# Altium PCB PCB_V1.PcbDoc (part 3 of 3)
Units mil, origin at the board's own origin, x right, y up, seen from the top; angles counter-clockwise.
Board outline 2382 x 2362.37 mil, 4 copper layers (L1, L2, L3, L4), stack 59.054 mil thick; 159 components, 117 nets, 497 pads, 313 vias.
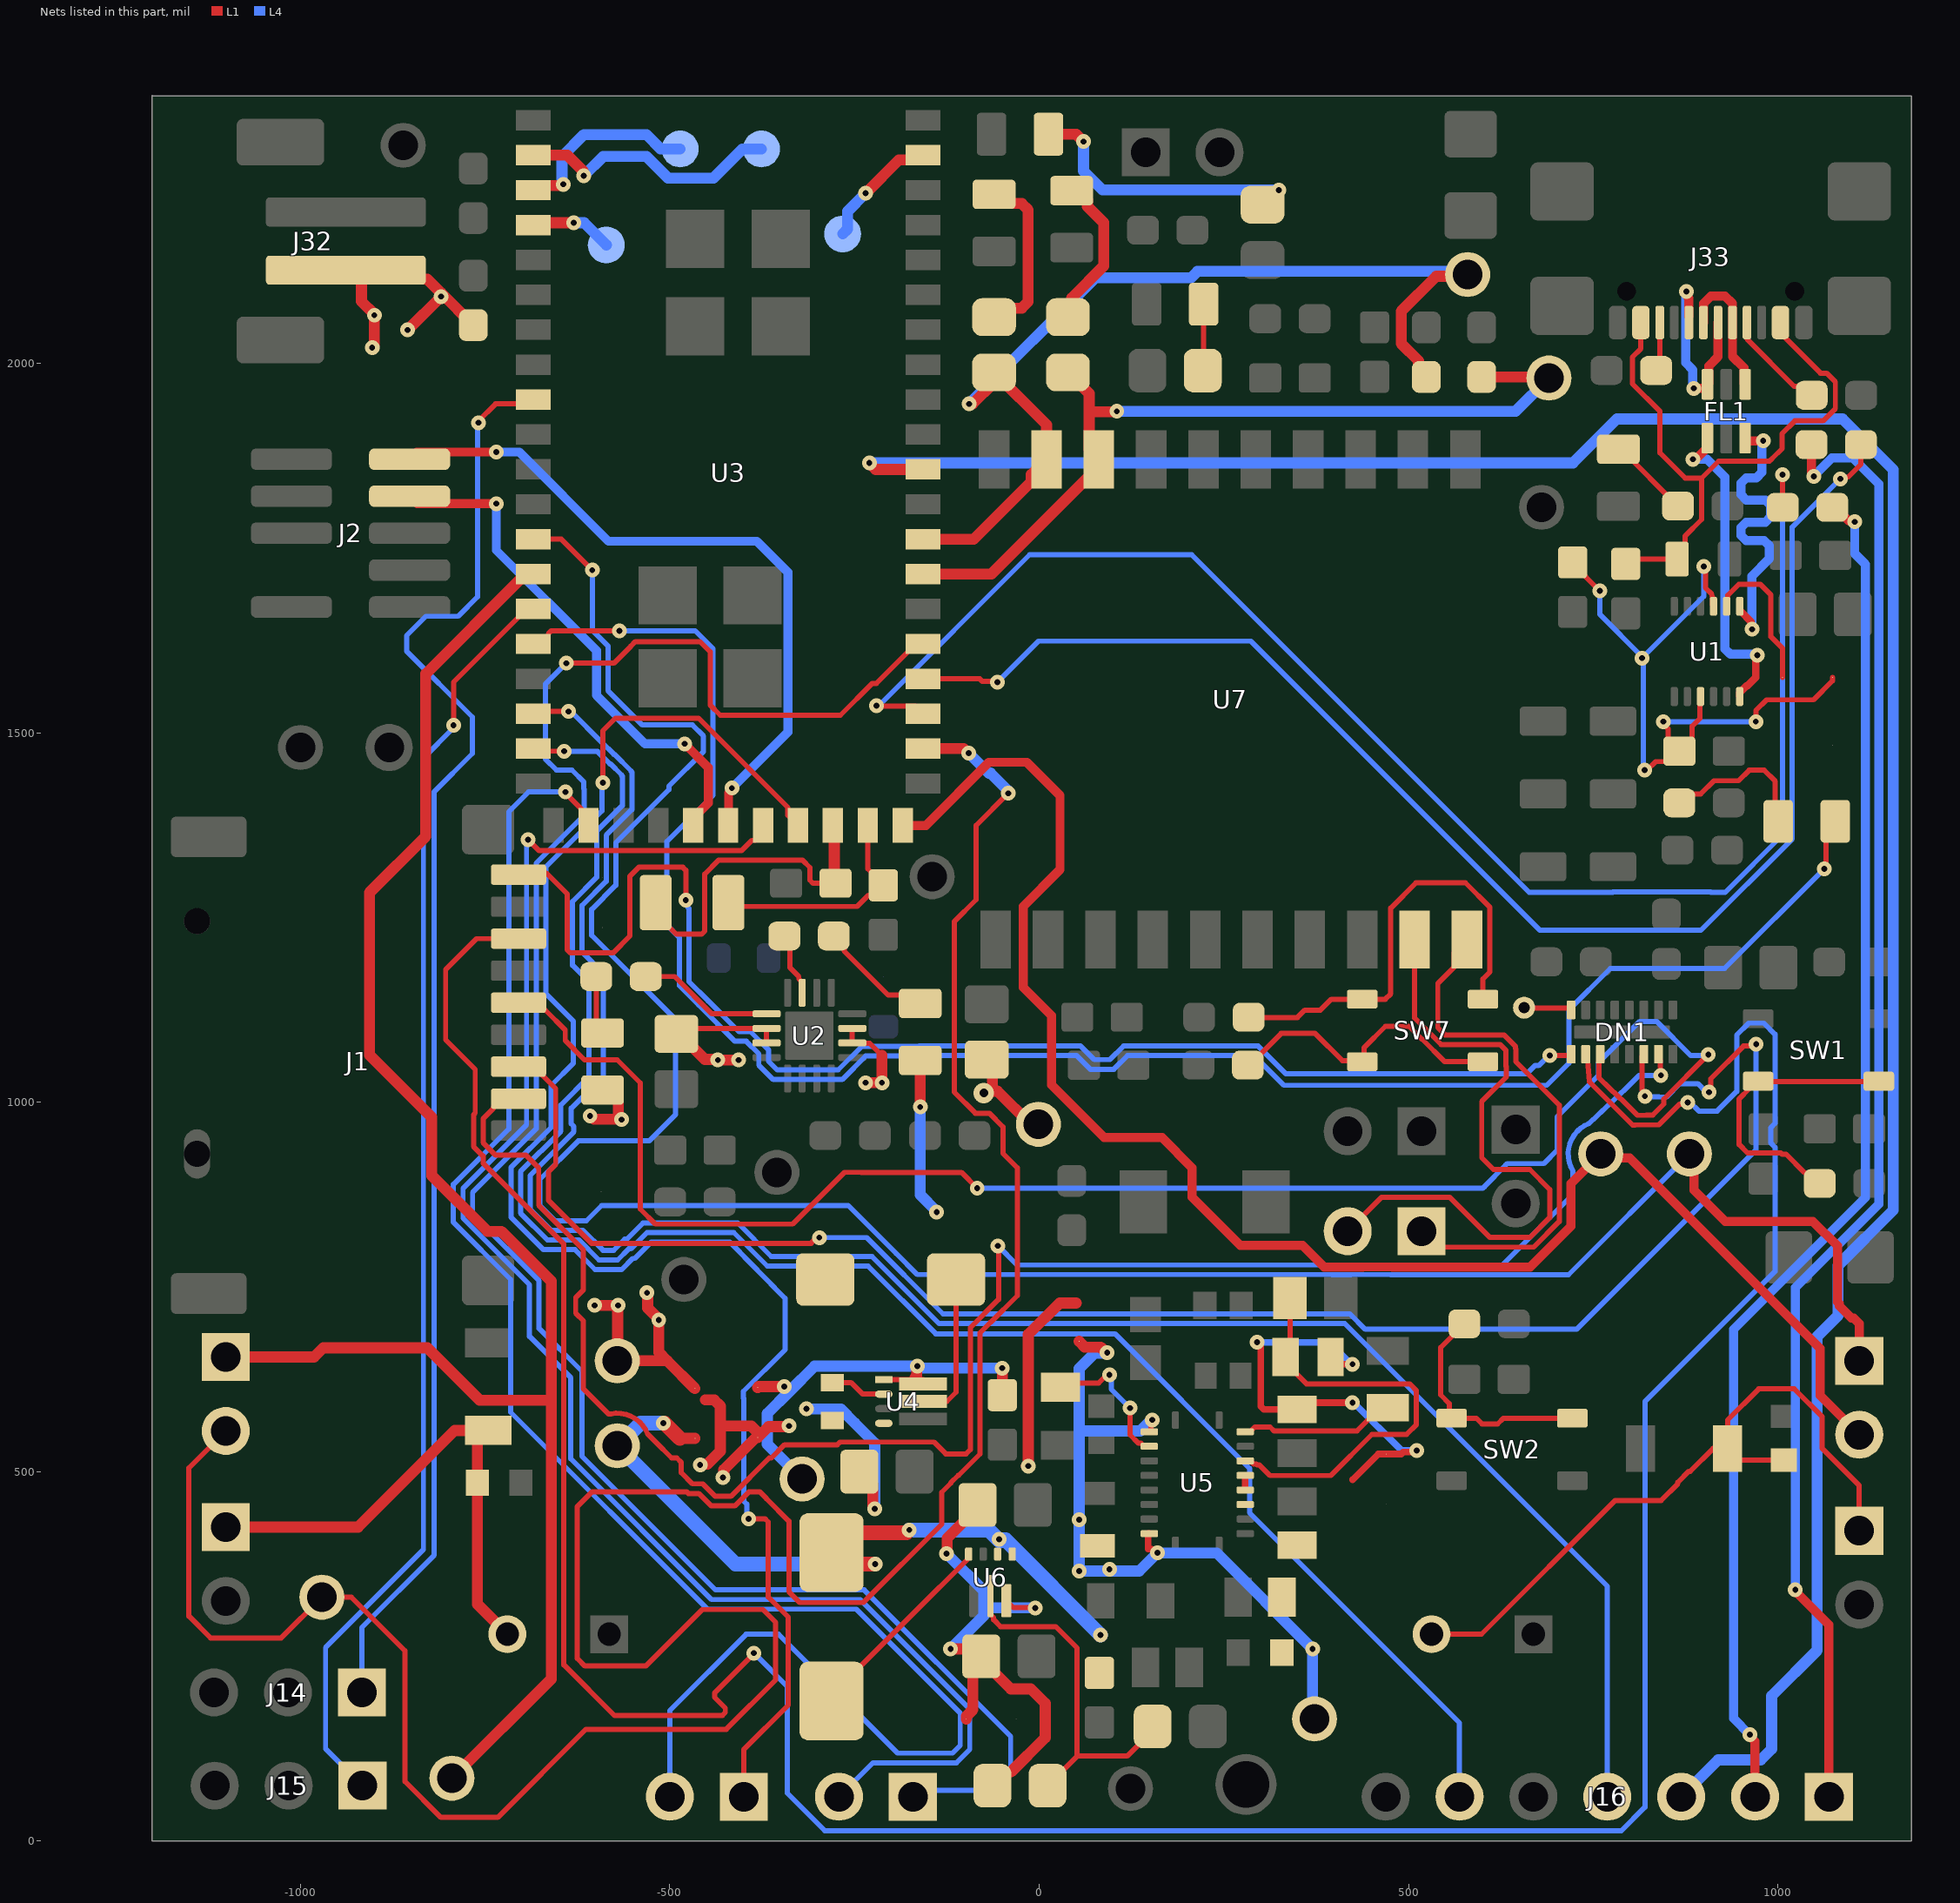
[diagram p5: the nets of this part, all layers, seen from the top]

## Via types
v1: diameter 20, hole 8, L1 to L4, tented both sides, 296 vias
v2: diameter 20, hole 8, L1 to L4, 12 vias
v3: diameter 25, hole 12.5, L1 to L4, tented both sides, 2 vias
v4: diameter 20, hole 8, L1 to L4, tented top, 2 vias
v5: diameter 27.56, hole 11.81, L1 to L4, tented both sides, 1 vias

## Nets (pads, with @x,y where several pads share a name; then routed paths per layer and width w, separated by ;. In a path a pad name is that pad's centre, name@x,y a point inside that pad or via, vN(x,y) a via of type N, cw(c..) or ccw(c..) an arc to the next point about the centre after c; other vN are vias at no path point) (continued)
NetC35_1: C35.1 C36.2 F1.2 J5.1 | length 717.6
  L1 w15: J5.1@-1101.07,425 -922,425 -791.28,555.72 -766.01,555.72 -755.93,565.81 F1.2@-746.07,555.95 -748.41,555.95 -760.6,543.76 -760.6,320.63 C36.2@-719.97,280
NetC37_1: C37.1 C38.2 F2.1 J7.1 | length 965
  L1 w7: C38.2@531.1,280 598.62,280 779.64,461.01 841.85,461.01 864.5,483.66 864.5,485.56 879.44,500.5 881.34,500.5 912.15,531.31 F2.1@931.84,531.31 947.58,515.56 993.76,515.56 C37.1@1007.98,515.56 ; F2.1@931.84,529.5 931.84,569.84 974,612 1022,612 1059.85,574.15 1059.85,531.33 1110,481.18 J7.1@1110,420
NetD1_A: D1.A R1.1 | length 112.6
  L1 w7: D1.A@783.93,1883.58 787.73,1883.58 R1.1@864.69,1806.63
NetD2_K: D2.K R4.2 | length 79.9
  L1 w7: R4.2@-599.53,1170 -599.53,1102.05 D2.K@-591.07,1093.59
NetD3_K: D3.K R3.2 | length 158.5
  L1 w7: R3.2@-278.05,1224.8 -263.91,1210.66 -263.91,1204.28 -204.63,1145 -172.48,1145 D3.K@-161.07,1133.59
NetD6_A: D6.A R7.2 | length 210.2
  L1 w7: R7.2@866.54,1405 878.68,1417.14 895.47,1417.14 913.33,1435 946.77,1435 960.93,1449.16 981.39,1449.16 996.33,1434.23 996.33,1384.03 D6.A@1000.35,1380
NetD12_A: D12.A R22.2 | length 366.6
  L1 w15: D12.A@12.51,2310 50,2310 v1(60,2300)
  L4 w15: v1(60,2300) 60,2260.19 85.75,2234.44 v1(324.44,2234.44)
NetD14_A: D14.A R36.2 | length 90.5
  L1 w7: R36.2@221.33,1990 222.51,1991.18 D14.A@222.51,2080
NetD15_A: D15.A R37.2 | length 214.5
  L1 w15: R37.2@38.93,2062.41 43.93,2067.41 43.93,2088.25 87.37,2131.68 87.37,2190.15 65.37,2212.15 65.37,2221.2 52.99,2233.58 D15.A@43.93,2233.58
NetD16_A: D16.A R38.2 | length 233.6
  L1 w15: R38.2@-61.07,2062.41 -48.91,2074.57 -23.79,2074.57 -15,2083.35 -15,2207.42 -23.79,2216.2 -48.69,2216.2 D16.A@-61.07,2228.58
NetDN1_1: DN1.1 J1.9 | length 1873.7
  L1 w7: J1.9@-704.88,1307.87 -702.13,1307.87 -700,1310 -667.2,1310 -638.96,1281.77 -638.96,1206.1 -634.86,1202 -577,1202 -554,1225 -554,1305.95 -542.04,1317.9 -482.54,1317.9 -478.44,1313.8 v1(-478.44,1273.32) ; v1(691.32,1063.13) 718.31,1063.13 DN1.1@720.04,1064.86
  L4 w7: v1(-478.44,1273.32) -475.95,1270.83 -475.95,1263.99 -474,1262.04 -474,1226.99 -474,1163.02 -448,1137.02 -448,1136.94 -406.56,1095.5 -391.1,1095.5 -366.56,1070.96 -366.56,1055.5 -354.73,1043.67 -272.11,1043.67 -240.18,1075.6 -163.12,1075.6 -162.72,1076 56.08,1076 74.51,1057.57 95.63,1057.57 114.06,1076 296.34,1076 333.66,1038.69 660.24,1038.69 671.03,1049.48 675.98,1049.48 689.63,1063.13 v1(691.32,1063.13)
NetDN1_2: DN1.2 J1.7 | length 4440.1
  L1 w7: J1.7@-704.88,1221.26 -761.8,1221.26 -803.5,1179.56 -803.5,1084.27 -763.5,1044.27 -763.5,985.2 -765.78,982.91 -765.78,939.92 -752.78,926.92 -752.78,917.35 -643.5,808.06 -643.5,238.5 -575,170 -429,170 -424.9,174.1 -424.9,179.9 -439.6,194.6 -439.6,200.4 -386.2,253.8 v1(-386.2,254.4) ; DN1.2@739.72,1064.86 742.13,1055.96 744.73,1027.56 801.26,971.03 803.31,968.98 806.24,968.98 838.67,969.29 866.4,997.02 875.34,997.02 v1(877.83,999.51)
  L4 w7: v1(-386.2,254.4) -341,209.19 -341,64.88 -290.12,14 787.99,14 819.93,45.95 819.93,594.76 996,770.83 996,938.94 990.38,944.56 990.38,965.68 996,971.3 996,1091.87 980.87,1107 960.38,1107 944.24,1090.85 944.24,1014.54 917.69,988 892.86,988 881.35,999.51 v1(877.83,999.51)
NetDN1_3: DN1.3 J1.5 | length 2269.8
  L1 w7: J1.5@-704.88,1134.64 -694.6,1124.37 -668.37,1124.37 -641.6,1097.6 -641.6,1083.37 -615.54,1057.3 -571.19,1057.3 -540,1026.11 -540,855.33 -519.67,835 -333.81,835 -263.72,905.1 -241.22,905.1 -240.99,904.87 -105.37,904.87 v1(-84,883.5) ; DN1.3@759.41,1064.86 757.73,1055.96 757.73,1032.94 772.67,1018.01 792.13,999.81 807.84,984.1 809.7,982.23 815.5,982.23 821.96,982.31 823.8,982.57 ; 823.81,982.58 830.49,982.58 845.42,997.51 845.42,1001.29 845.42,1004.19 v1(905.74,1064.5)
  L4 w7: v1(-84,883.5) -63.5,883.5 597.62,883.5 600.52,883.5 602.62,885.6 631.23,914.74 633.31,916.82 683.09,916.82 701,934.73 701,980.19 756.93,1036.11 756.93,1053.27 812.86,1109.19 835.81,1109.19 882,1063 904.24,1063 v1(905.74,1064.5)
NetDN1_6: DN1.6 J1.3 | length 2434.3
  L1 w7: J1.3@-704.88,1048.03 -683.33,1048.03 -673.05,1037.75 -673.05,1036.89 -665.16,1029 -654.54,1018.4 -654.54,915.54 -664.5,905.58 -664.5,867.4 -606.11,809 -308.88,809 -301.17,816.72 v1(-297.65,816.72) ; DN1.6@818.46,1064.86 816.06,1062.45 816.06,1046.95 816,1046.89 816,1015.52 819.92,1011.59 v1(819.92,1008.08) ; v1(906.49,1013.5) 908.97,1015.99 908.97,1031.68 953.3,1076.01 968.01,1076.01 v1(970.5,1078.49)
  L4 w7: v1(-297.65,816.72) -233.49,816.72 -130.27,713.5 420.5,713.5 441.41,692.59 727.53,692.59 970.5,935.56 v1(970.5,1078.49) ; v1@820.08,1007.92 820.93,1007.07 839.11,1007.07 839.26,1006.92 849.18,1006.92 867.29,1025.03 891.44,1025.03 902.97,1013.5 v1(906.49,1013.5)
NetDN1_7: DN1.7 J1.2 | length 2529.9
  L1 w7: J1.2@-704.88,1004.72 -728.5,1004.72 -738.78,994.45 -738.78,991.53 -752.78,977.53 -752.78,945.31 -735.62,928.14 -694.67,928.14 -677.5,910.97 -677.5,860.45 -617,799.95 -617,746.06 -627.5,735.56 -627.5,714.44 -617,703.94 -617,612 -583.18,578.18 -580.28,578.18 -579.62,578.18 cw(c-571.07,535) -530.05,550.96 -529.05,549.96 -519.24,540.15 -497.59,518.5 -490.57,518.5 -484.5,512.44 -484.5,498.44 -469.56,483.5 -455.56,483.5 -438.56,466.5 -417.44,466.5 -365.43,518.5 -362.66,518.5 -344.77,536.39 -273.31,536.39 -269.66,540.03 -142.47,540.03 -126.44,524 -99.08,524 -93.19,529.9 -93.19,694.84 -55,733.03 -55,804.63 v1(-55.87,805.5) ; DN1.7@838.15,1064.86 840.56,1055.96 v1(841.5,1036.33)
  L4 w7: v1(-55.87,805.5) -30.05,779.67 412.24,779.67 412.45,779.67 ccw(c417.5,825.39) 422.54,779.67 479.13,779.67 479.4,779.39 626.62,779.39 722.6,875.37 722.6,906.8 cw(c760,930) 724.42,955.91 cw(c760,930) 744.15,971.06 795.6,1019.82 811.7,1035.91 841.08,1035.91 v1(841.5,1036.33)
NetJ33_A5: J33.A5 R15.2 | length 141.6
  L1 w7: J33.A5@958.14,2055.12 958.14,2032.49 1021.84,1968.79 1033.54,1968.79 R15.2@1045.68,1956.65
NetJ33_B5: J33.B5 R13.2 | length 66.9
  L1 w7: R13.2@835.08,1990.27 840.03,1995.22 J33.B5@840.03,2055.12
NetL1_1: L1.1 U4.6 | length 202.5
  L1 w7: U4.6@-157.28,595 -125,595 -112.49,607.51 L1.1@-112.49,760
NetL3_1: L3.1 U6.7 | length 275.6
  L1 w7: L3.1@-281.07,189.61 -281.07,197.32 -170.95,307.44 -97.02,381.37 -97.02,383.03 -95.6,384.45 U6.7@-95.6,388.39
NetR3_1: R3.1 U2.7 | length 86.8
  L1 w7: R3.1@-344.98,1224.8 -337.38,1217.2 -337.38,1181.98 -325.39,1169.98 -325.39,1166.78 -320.91,1162.3 U2.7@-320.91,1148
NetR4_1: R4.1 U2.9 | length 184.5
  L1 w7: R4.1@-532.6,1170 -493.58,1170 -443.08,1119.5 -409.44,1119.5 ; -409.4,1119.53 U2.9@-369.06,1119.53
NetR8_1: R8.1 SW1.3 SW1.4 | length 394.6
  L1 w7: R8.1@1056.54,890 1051.15,890 1036.08,905.07 1035.47,905.07 1010.92,929.62 1005.32,929.62 1003.63,931.31 958.85,931.31 947.54,942.62 947.54,1004.43 961.49,1018.38 974.64,1025.65 973.15,1027.14 SW1.3@973.15,1028.34 973.81,1027.68 1135.87,1027.68 SW1.4@1136.54,1028.34
NetR9_1: R9.1 SW2.3 SW2.4 | length 322.3
  L1 w7: R9.1@575.47,700 543.31,667.85 543.31,603.85 555,592.17 555,572.32 555,570 555.98,570 SW2.4@558.31,572.32 591.61,572.32 599.44,564.5 620.56,564.5 628.39,572.32 SW2.3@721.69,572.32
NetR25_2: R25.2 U5.3 | length 198.3
  L1 w7: R25.2@28.93,614.37 34.56,620 80.48,620 91.48,631 v1(95,631) ; v1(123,586) 123,549.65 133.97,538.68 137.42,538.68 140.66,535.44 147.75,535.44 U5.3@148.97,534.22
  L4 w7: v1(95,631) 97.49,628.51 97.49,611.51 v1(123,586)
NetR26_1: R26.1 U5.19 | length 210.7
  L1 w7: U5.19@278.89,553.9 285.36,553.9 291.74,560.27 312.59,560.27 318.01,554.86 379.86,554.86 379.99,554.99 430.12,554.99 461.75,586.62 R26.1@471.59,586.62
NetR27_2: R27.2 R29.1 U5.17 | length 597.9
  L1 w7: U5.17@278.89,514.53 285.98,514.53 290.44,510.07 293.89,510.07 294.69,509.27 297.73,509.27 312.35,494.65 394.73,494.65 450.34,550.25 497.32,550.25 510.64,563.57 510.64,609.67 501.58,618.72 361.71,618.72 333.38,647.06 R27.2@333.38,655 339.48,661.11 R29.1@339.48,735
NetR30_2: R30.2 R31.1 U6.2 | length 487.4
  L1 w7: U6.2@-66.07,331.3 -66.07,306.7 -61.8,302.43 -61.8,299.58 -52.25,290.03 22.53,290.03 51.33,261.23 51.33,115 ; R31.1@11.33,75 51.4,115.07 118.99,115.07 153.51,149.58 R30.2@153.51,155.14
NetR35_2: R35.2 SW7.1 SW7.2 | length 612.2
  L1 w7: R35.2@283.46,1115 283.96,1114.5 349.44,1114.5 359.44,1124.5 380.56,1124.5 395.44,1139.37 SW7.1@437.3,1139.37 468.47,1139.37 475.76,1146.66 475.76,1262.59 510.01,1296.83 576.99,1296.83 610.1,1263.72 610.1,1176.29 600.69,1166.87 SW7.2@600.69,1139.37
NetR39_1: R39.1 SW7.3 SW7.4 | length 401.4
  L1 w7: R39.1@282.4,1050 284.4,1050 327.39,1093 373.45,1093 410.23,1056.22 435.81,1056.22 SW7.3@437.3,1054.73 439.83,1057.26 439.83,1073.92 468.6,1102.69 500.56,1102.69 517.65,1085.6 518,1085.6 548.87,1054.73 SW7.4@600.69,1054.73
NetR40_1: R40.1 U4.2 | length 76.1
  L1 w7: R40.1@-280,620.59 -254.8,620.59 -239.06,604.85 U4.2@-210.43,604.84
OUT_3V3: C33.2 JP11.1 L1.2 R40.2 U4.4 | length 259.9
  L1 w15: C33.2@-243.47,500 -225.38,481.91 -225.38,453.65 -222.59,450.85 v1(-222.59,449.5)
  L4 w15: v1(-315,585) -314.72,584.72 -268.72,584.72 -249.79,565.79 -222.59,538.59 v1(-222.59,449.5)
OUT_5V: C27.2 C31.2 JP12.1 R31.2 U6.3 | length 764.4
  L1 w7: U6.3@-44.41,325.4 -34.97,315.96 v1@-5.96,315.96
  L1 w15: v1(-125.49,388.95) -124.54,389.91 -124.54,410 -83.47,451.07 C27.2@-83.47,455 ; v1(-120,260) -88.47,260 C31.2@-78.47,250 ; JP12.1@-98.75,165 -98.75,168.94 -89.82,177.87 -89.82,238.66 C31.2@-78.47,250 ; R31.2@-63.47,75 -63.47,76.08 -45.78,93.76 -38.04,93.76 8.18,139.98 8.18,186.32 -11.47,205.98 -38.38,205.98 -78.47,246.07 C31.2@-78.47,250 ; v1@-5.96,315.96 v1(-5.53,315.53)
  L4 w15: v1(-125.49,388.95) -123.92,387.38 -123.8,387.38 -75,338.57 -75,315.53 ; v1(-120,260) -75,305 -75,315.53 ; v1(-5.53,315.53) -75,315.53
OUT_6V: C24.1 C25.1 JP10.1 R27.1 U5.14 U5.15 U5.16 | length 616.8
  L1 w9: U5.15@278.89,475.16 U5.16@278.89,494.85 ; v1(295,675) 295.9,675 300,670.9 300,621 300,588.16 304.1,584.06 336.94,584.06 C25.1@348.93,584.06 ; C25.1@359.18,594.31 360.27,593.22 v1(424.05,593.22) ; R27.1@394.49,655 404.18,645.31 v1(424.05,645.31) ; 424,489 458.75,523.75 JP10.1@470,523.75 490,523.75 492.53,526.28 508.49,526.28 v1(510.85,528.64)
  L4 w9: v1(295,675) 392.68,675 422.37,645.31 v1(424.05,645.31) ; v1(424.05,593.22) 426.01,593.22 490.35,528.88 510.61,528.88 v1(510.85,528.64)
PA02_PWM_1: J8.2 TP21.1 U3.31 | length 2206.3
  L1 w12.33: U3.31@-184.85,1374.45 -153.56,1374.45 -68.01,1460 -17,1460 28.16,1414.84 28.16,1314.82 -21.83,1264.83 -21.83,1155.54 16.72,1116.99 16.72,1023.28 88.02,951.98 166.02,951.98 207,911 207,871.59 272.43,806.15 356.52,806.15 385.94,776.73 437.65,776.73 437.92,776.99 478.04,776.99 478.3,776.73 664.5,776.73 719.66,831.89 719.66,889.66 TP21.1@760,930 765.35,924.65 799.3,924.65 1057.18,666.77 1057.18,602.82 J8.2@1110,550
PA03_PWM_1: J6.2 TP20.1 U3.33 | length 3930.3
  L1 w7: J6.2@-1101.07,555 -1151.07,505 -1151.07,304.29 -1121.78,275 -1026.07,275 TP20.1@-971.07,330 -931,330 -858.55,257.55 -858.55,80.65 -809.89,31.99 -733.01,31.99 -613.65,151.35 -423.61,151.35 -356.7,218.26 -356.7,296.02 -373.98,313.3 -456.31,313.3 -532.69,236.91 -615.01,236.91 -625.26,247.17 -625.26,452.69 -605.52,472.43 -476.87,472.43 -474.95,470.5 -460.95,470.5 -443.95,453.5 -412.05,453.5 -393.13,472.43 -377.87,472.43 -369.08,463.64 -369.08,463.21 -338.88,433.01 -338.88,367.28 -338.88,337.59 -324.04,322.75 -238.1,322.75 -132,428.85 -132,472 -119.56,484.44 -119.56,485.13 -109.66,495.03 -108.97,495.03 -80.19,523.81 -80.19,687.81 -66,702 -65.62,702 -29.5,738.12 -29.5,911.05 -49.08,930.63 -49.08,966.62 -67.47,985 -86.47,985 -115.1,1013.63 -115.1,1244.32 -85.54,1273.87 -85.54,1374.46 v1(-42,1418)
  L1 w15: U3.33@-157.14,1478.44 -102.63,1478.44 -96.69,1472.5 v1(-95.34,1472.5)
  L4 w15: v1(-95.34,1472.5) -68.23,1445.39 -65.89,1445.39 -42.96,1422.46 -42.96,1418.96 v1(-42,1418)
"PA04 OLED SPI_MOSI": R16.2 U3.34 | length 2132.3
  L1 w7: v1(-220.28,1536.5) -219.74,1535.96 -167.42,1535.96 U3.34@-157.14,1525.68 ; v1(1006.21,1849.17) 1006.21,1805.32 R16.2@1006.53,1805
  L4 w7: v1(-220.28,1536.5) -217.28,1536.5 -13,1740.79 206.39,1740.79 663.18,1284 776.32,1284 776.82,1284.5 908.8,1284.5 909.3,1284 928.53,1284 1006.21,1361.68 v1(1006.21,1849.17)
"PA04 OLED SPI_MOSI_1": J16.1 R17.1 | length 1999.8
  L1 w12.33: v1(1023.5,340) 1023.5,337.92 1068.93,292.49 J16.1@1068.93,60 ; R17.1@1045.47,1890 1045.47,1852.11 1048.71,1848.87 v1(1048.71,1846.79)
  L4 w12.33: v1(1023.5,340) 1023.5,749.21 1136.49,862.2 1136.49,1836.51 1101.34,1871.66 1072.8,1871.66 1048.71,1847.57 v1(1048.71,1846.79)
"PA05 OLED SPI_SCK": R17.2 U3.35 | length 1991.7
  L1 w7: U3.35@-157.14,1572.92 -80.5,1572.92 -77,1569.42 -57.42,1569.42 v1(-56.5,1568.5) ; v1(1084.47,1843.5) 1086.95,1845.99 1095.07,1845.99 1112.4,1863.32 R17.2@1112.4,1890
  L4 w7: v1(-56.5,1568.5) -1,1624 286.41,1624 677.91,1232.5 895.42,1232.5 1019.21,1356.3 1019.21,1778.25 v1(1084.47,1843.5)
"PA05 OLED SPI_SCK_1": J16.2 R16.1 | length 1855.7
  L1 w12.33: v1(961.86,144) 961.86,141.92 968.97,134.82 J16.2@968.93,60 ; R16.1@1073.46,1805 1077.41,1805 1095.5,1786.9 1102.43,1786.9 v1(1103.89,1785.43)
  L4 w12.33: v1(961.86,144) 940,165.86 940,692.68 1118.16,870.84 1118.16,1727.91 1103.89,1742.17 v1(1103.89,1785.43)
PA06_5: J9.1 U3.36 | length 2790.6
  L1 w7: v1(-640.28,1594.03) -575.69,1594.03 -552.89,1616.83 -552.89,1617.2 -546.74,1623.35 -459.3,1623.35 -445.47,1609.52 -445.47,1537.44 -431.64,1523.61 -269.23,1523.61 -226.09,1566.75 -220.4,1566.75 -166.98,1620.17 U3.36@-157.14,1620.17
  L4 w7: v1(-640.28,1594.03) -668.5,1565.81 -668.5,1464.44 -653.56,1449.5 -632.44,1449.5 -616.33,1433.39 -616.33,1424.15 -615.94,1423.77 -615.94,1388.5 -681.01,1323.43 -681.01,963.93 -767,877.94 -767,848.27 -677,758.27 -677,693.69 -619,635.69 -619,520.69 -438.2,339.9 -236.89,339.9 -38.66,141.67 -38.66,99 -68.83,68.83 -162.24,68.83 J9.1@-171.07,60
"PA11 OLED SS_1": J16.3 U3.41 | length 3464.3
  L1 w15: v1(-230,1865) -221.39,1856.39 U3.41@-157.14,1856.39
  L4 w15: v1(-230,1865) 722.5,1865 782,1924.5 1087.5,1924.5 1156.15,1855.85 1156.15,854.06 1081.16,779.07 1081.16,710.91 1053,682.75 1053,258 991.36,196.36 991.36,124.64 976.72,110 918.93,110 J16.3@868.93,60
PA17_1: J14.1 U3.9 | length 1972.2
  L1 w7: v1(-759.07,1919.5) -759.07,1921.83 -735.9,1945 -690.58,1945 U3.9@-684.7,1950.88
  L4 w7: J14.1@-917.03,201.11 -917.03,288.97 -819,387 -819,791.38 -819.38,791.76 -819.38,1419.68 -767.31,1471.75 -767.31,1521.25 -856.37,1610.31 -856.37,1631.43 -830.24,1657.57 -786.63,1657.57 -760.5,1683.7 -760.5,1918.07 v1(-759.07,1919.5)
PA20_FB_M2_1: J8.1 TP22.1 U3.13 | length 3426.6
  L1 w7: U3.13@-684.7,1761.9 -646.9,1761.9 v1(-605,1720)
  L1 w12.33: TP22.1@880,930 886.17,923.83 886.17,881 928.57,838.6 1047.22,838.6 1080.46,805.35 1080.46,729.71 1082.84,727.33 1082.84,724.33 1099.33,707.84 1102.33,707.84 1110,700.17 J8.1@1110,650
  L4 w7: v1(-605,1720) -605,1638.65 -583.78,1617.43 -583.78,1556.98 -537.3,1510.5 -469.44,1510.5 -454.5,1495.56 -454.5,1474.44 -501.3,1427.64 -501.3,1422.94 -573.1,1351.15 -573.1,1293.5 -605.72,1260.88 -605.72,1225.72 -492.5,1112.5 -492.5,982.9 -520.9,954.5 -527.9,947.5 -623.91,947.5 -676.04,895.36 -676.04,860.55 -654.95,839.46 -613.02,839.46 -592.48,860 -258.39,860 -193.88,795.5 -165.06,766.67 383.83,766.67 383.92,766.67 384.04,766.67 395.96,766.39 422.24,766.39 444.96,766.67 466.08,766.67 475.69,766.39 716.39,766.39 TP22.1@880,930
PA21_FB_M1_1: J6.1 TP23.1 U3.14 | length 2371.4
  L1 w15: J6.1@-1101.07,655 -981.58,655 -969.12,667.46 -828.18,667.46 -757.22,596.5 -660.5,596.5 ; TP23.1@-795,85 -660.5,219.5 -660.5,596.5 ; U3.14@-684.7,1714.66 -690.98,1708.38 -701.64,1708.38 -830.5,1579.52 -830.5,1359.65 -906.5,1283.65 -906.5,1063.78 -822.31,979.59 -822.31,900.59 -746.83,825.11 -728.17,825.11 -660.5,757.44 -660.5,596.5
PA22_1: J15.1 U3.15 | length 1739.1
  L1 w7: v1(-792.81,1510) -792.81,1568.41 -704.82,1656.4 -704.82,1657.14 -694.54,1667.41 U3.15@-684.7,1667.41
  L4 w7: J15.1@-913.46,72.4 -966,124.94 -966,262 -833.53,394.47 -833.53,1465.76 -792.81,1506.48 v1(-792.81,1510)
"PA24 OLED RST_1": J16.4 U3.18 | length 2829.2
  L1 w7: U3.18@-684.7,1525.68 -681.67,1528.71 v1(-637.16,1528.71)
  L4 w7: v1(-637.16,1528.71) -633.71,1528.71 -592.59,1487.59 -575.84,1470.84 -574.88,1470.84 -552.33,1448.28 -552.33,1447.33 -551.38,1446.38 -551.38,1395.94 -586.1,1361.23 -586.1,1298.88 -618.72,1266.26 -618.72,1202.89 -590.08,1174.25 -590.08,1035.23 -633.54,991.76 -633.54,970.64 -629.88,966.97 -629.88,959.91 -689.04,900.75 -689.04,855.17 -660.33,826.46 -617.52,826.46 -590.56,799.5 -576.03,799.5 -561.03,814.5 -558.27,814.5 -536.29,836.48 -408.05,836.48 -362.79,791.22 -226.37,791.22 -135.65,700.5 413.5,700.5 768.93,345.07 J16.4@768.93,60
"PA25 OLED A0_1": J16.6 U3.19 | length 2525.8
  L1 w7: U3.19@-684.7,1478.44 -681.26,1475 v1(-643,1475)
  L4 w7: v1(-643,1475) -642.59,1474.59 -597.97,1474.59 -581.22,1457.84 -580.26,1457.84 -565.33,1442.9 -565.33,1441.94 -564.38,1441 -564.38,1401.33 -599.1,1366.61 -599.1,1304.27 -631.72,1271.65 -631.72,1185.27 -609.27,1162.82 -609.27,1034.42 -647.66,996.03 -647.66,960.51 -702.04,906.13 -702.04,849.79 -665.72,813.46 -622.91,813.46 -595.95,786.5 -570.65,786.5 -555.65,801.5 -552.88,801.5 -530.91,823.48 -413.43,823.48 -368.17,778.22 -231.76,778.22 -140.04,686.5 102.56,686.5 284.63,504.44 284.63,444.3 568.93,159.99 J16.6@568.93,60
PB02_5: J9.2 U3.27 | length 2217.4
  L1 w7: v1(-691.79,1355.05) -677.07,1340.33 -639.16,1340.33 -638.99,1340.5 -628.34,1340.5 -628.17,1340.33 -402.94,1340.33 -388.94,1354.33 -384.1,1354.33 -373.82,1364.61 U3.27@-373.82,1374.45
  L4 w7: v1(-691.79,1355.05) -694.01,1352.83 -694.01,969.32 -780,883.33 -780,842.89 -690,752.89 -690,683 -634,627 -634,517.31 -443.59,326.9 -242.28,326.9 -94,178.62 -94,123.96 -111.96,106 -225.07,106 J9.2@-271.07,60
PB03_5: J4.1 U3.28 | length 2286.7
  L1 w7: v1(-590.83,1432.34) -590.83,1502.34 -573.55,1519.61 -461.08,1519.61 -340.36,1398.9 -340.36,1388.23 U3.28@-326.58,1374.45 ; J4.1@-400,60 -400,123.87 -339.7,184.17 -339.7,303.06 -366.94,330.3 -366.94,431.94 -371.21,436.21 v1(-393.28,436.21)
  L4 w7: v1(-590.83,1432.34) -591.78,1431.38 -591.78,1394.28 -668.01,1318.05 -668.01,1146.95 -630.49,1109.43 -630.49,1052.75 -660.66,1022.58 -660.66,965.9 -715.04,911.52 -715.04,844.4 -671.1,800.46 -628.29,800.46 -601.33,773.5 -565.26,773.5 -550.26,788.5 -547.5,788.5 -525.53,810.47 -418.81,810.47 -416.75,808.41 -346.01,736.41 -344,734.37 -344,665.04 -400.5,608.54 -400.5,599.44 -400,598.94 -400,460.21 -395.77,455.98 -395.77,438.7 v1(-393.28,436.21)
PB22_5: J4.2 U3.22 | length 2466.1
  L1 w7: v1(-641.44,1419.75) -641.44,1418.39 -619.27,1396.22 -619.27,1393.52 -610.04,1384.3 U3.22@-610.04,1374.45
  L4 w7: v1(-641.44,1419.75) -691.32,1419.75 -718.1,1392.97 -718.1,963.62 -793,888.71 -793,837.5 -715.5,760 -715.5,580.42 -448.97,313.9 -247.66,313.9 -107,173.23 -107,129.35 -117.34,119 -191.91,119 -352.8,279.9 -396.77,279.9 -500,176.66 J4.2@-500,60
RS_3: JP1.2 U1.2 | length 204.2
  L1 w7: U1.2@930.51,1671.03 931.93,1672.45 931.93,1685.86 946.95,1700.88 952.16,1700.88 952.25,1700.98 975.84,1700.98 990.44,1686.38 990.44,1629.88 1006.25,1614.06 JP1.2@1006.25,1575
SCL_AI_1: R23.1 R38.1 TP24.1 U3.39 U7.9 | length 1388.5
  L1 w15: U3.39@-157.14,1761.9 -88.63,1761.9 -10.87,1839.66 -10.87,1849.34 U7.9@9.8,1870 9.8,1916.74 R38.1@-61.07,1987.6 -61.07,1973.93 -90,1945 v1(-95,1945) ; R23.1@523.93,1981.54 513.32,1992.15 513.32,2003.29 489.93,2026.67 489.93,2070.26 537.35,2117.68 577.68,2117.68 TP24.1@580,2120
  L4 w15: v1(-95,1945) 75.5,2115.5 205.51,2115.5 214.35,2124.35 575.65,2124.35 TP24.1@580,2120
SD_CARD_DETECT_2: DN1.16 TP1.1 | length 65.1
  L1 w7: TP1.1@656.32,1127.83 656.88,1127.3 717.63,1127.3 720.04,1124.89 DN1.16@720.04,1124.7
SDA_AI_1: R21.1 R37.1 TP25.1 U3.38 U7.8 | length 1172.3
  L1 w15: U3.38@-157.14,1714.66 -65,1714.66 U7.8@85.5,1865.17 ; R37.1@38.93,1987.6 67.49,1959.04 67.49,1933.89 ; U7.8@80.66,1870 67.49,1883.17 67.49,1933.89 ; v1@104.4,1934.4 68,1934.4 67.49,1933.89 ; R21.1@598.93,1981.54 688.46,1981.54 TP25.1@690,1980
  L4 w15: v1(105,1935) 645,1935 TP25.1@690,1980
SPK+_9: J10.1 U7.20 | length 722.6
  L1 w7: J10.1@517.5,825.39 539.07,803.82 669.44,803.82 704,838.38 704,996 645.31,1054.69 645.31,1072.06 644.86,1072.51 644.86,1075.38 629.22,1091.02 549.35,1091.02 539.55,1100.82 539.55,1160.72 561.76,1182.93 561.76,1202.84 U7.20@578.93,1220
SPK-_9: J10.2 U7.19 | length 881.5
  L1 w7: J10.2@417.5,825.39 463.5,871.39 555.59,871.39 610.16,816.82 664.05,816.82 691,843.77 691,881.87 664.05,908.82 614.91,908.82 599,924.73 599,1000.91 632.31,1034.22 632.31,1048.3 631.86,1048.75 631.86,1070 623.83,1078.02 543.96,1078.02 508.07,1113.92 U7.19@508.07,1220
SWCLK_5: J2.4 U3.25 | length 715.9
  L1 w12: J2.4@-852.26,1820.09 -842.17,1810 v1(-735,1810) ; v1(-480,1485) -447.8,1452.8 -447.8,1404.81 -468.31,1384.3 U3.25@-468.31,1374.45
  L4 w12: v1(-735,1810) -735,1746.73 -599.28,1611.01 -599.28,1550.56 -533.72,1485 v1(-480,1485)
SWDIO_5: J2.2 U3.26 | length 959.8
  L1 w12: J2.2@-852.26,1870.09 -842.35,1880 v1(-735,1880) ; U3.26@-421.07,1374.45 -420.43,1375.09 -420.43,1418.4 -416,1422.84 v1(-416,1425)
  L4 w12: v1(-735,1880) -704,1880 -583,1759 -382.07,1759 -340.23,1717.17 -340.23,1500.77 v1(-416,1425)
USB_1_N: FL1.1 J33.A7 J33.B7 | length 190
  L1 w12.33: J33.A7@899.09,2055.12 899.09,2080.87 909.15,2090.92 928.4,2090.92 938.46,2080.87 J33.B7@938.46,2055.12 938.46,2029.38 938.46,2008.96 953.88,1993.54 953.88,1973.13 FL1.1@955.59,1971.42
USB_1_P: FL1.3 J33.A6 J33.B6 | length 275.3
  L1 w12.33: v1(876,2097) 877.47,2095.53 877.47,2090.11 879.4,2088.17 J33.B6@879.4,2064 ; v1(886,1966) 902.7,1966 FL1.3@902.7,1967 ; FL1.3@906.12,1973.13 906.12,1996.12 918.77,2008.77 J33.A6@918.77,2055.12
  L4 w12.33: v1(876,2097) 875,2096 875,2000.65 884.53,1991.12 884.53,1967.47 v1(886,1966)
USB_FTDI_DATA_3_N: FL1.6 U1.1 | length 436.8
  L1 w10: U1.1@949.46,1664.4 963.47,1650.39 963.47,1641.47 v1(964.94,1640)
  L1 w12.33: FL1.6@955.59,1898.58 955.59,1896.71 957.3,1895 v1(980,1895)
  L4 w12.33: v1(980,1895) 978.53,1893.53 978.53,1888.11 978.05,1887.62 978.05,1852.22 970.83,1845 957.22,1845 950,1837.78 950,1822.22 957.22,1815 982.78,1815 990,1807.78 990,1792.22 982.78,1785 957.22,1785 950,1777.78 950,1767.22 957.22,1760 981.25,1760 988.47,1752.78 988.47,1735.69 964.59,1711.81 v1@964.59,1640.35 ; v1@964.59,1640.35 v1(964.94,1640) v1@964.59,1640.35
USB_FTDI_DATA_3_P: FL1.4 U1.12 | length 438.4
  L1 w10: U1.12@948.22,1548.98 948.22,1554.37 957.23,1563.38 958.6,1563.38 970,1574.78 970,1602.86 v1(972.14,1605)
  L1 w12.33: v1(885,1870) 886.47,1871.47 890.09,1871.47 904.41,1885.79 FL1.4@904.41,1898.58
  L4 w12.33: v1(885,1870) 904.06,1870 928.27,1845.79 928.27,1613.56 935.49,1606.34 970.8,1606.34 v1(972.14,1605)
USER_LED_5: D6.K U3.16 | length 2642.2
  L1 w7: U3.16@-684.7,1620.17 -674.86,1620.17 -664.58,1630.45 -664.58,1633.83 -660.48,1637.93 v1(-568.22,1637.93) ; v1(1062.73,1315.67) 1064.97,1317.91 1064.97,1367.46 D6.K@1077.52,1380
  L4 w7: v1(-568.22,1637.93) -465.93,1637.93 -441.5,1613.5 -441.5,1415.31 -503.94,1352.87 -503.94,1239.55 -487,1222.61 -487,1157.64 -461,1131.64 -461,1131.55 -411.95,1082.5 -396.49,1082.5 -379.56,1065.57 -379.56,1050.11 -360.12,1030.67 -266.73,1030.67 -234.8,1062.6 -157.73,1062.6 -157.33,1063 50.69,1063 69.12,1044.57 101.02,1044.57 119.45,1063 290.96,1063 331.14,1022.82 687.07,1022.82 716.82,1052.57 716.82,1124.82 773,1181 927.62,1181 1062.28,1315.67 v1(1062.73,1315.67)
VBAT: C7.2 J32.1 R12.1 TP11.1 U2.2 U2.3 | length 642.4
  L1 w7: U2.2@-253.07,1080.16 U2.3@-253.07,1099.85 ; U2.2@-252.6,1079.69 -229.43,1079.69 -212.86,1063.12
  L1 w15: J32.1@-938.58,2125.93 -929.58,2125.93 J32.1@-917.4,2113.74 ; v1(-903,2021) -903,2022.35 -900,2025.35 v1(-900,2065) ; v1@-898.65,2065 v1(-900,2065) ; v1@-855.96,2045.96 v1(-855,2045) v1(-809.76,2090.24) -810.72,2091.19 -810.72,2096.29 -828.17,2113.74 J32.1@-917.4,2113.74 ; v1@-809.76,2095.24 R12.1@-766.07,2051.54 ; v1@-236.43,1026.25 v1(-235.08,1026.25) v1(-212.86,1026.25) -212.86,1063.12 ; v5(-75,1012.41) -72.6,1014.81 -63.59,1014.81 v5@-63.4,1015 ; C7.2@-71.07,1057.6 -63.4,1049.93 v5@-63.4,1015 ; TP11.1@-1.07,970 -11.61,970 -56.6,1015 v5@-63.4,1015 ; J32.1@-917.4,2113.74 -917.4,2083.75 -900,2066.35 v1(-900,2065)
VBUS: C2.2 FB1.1 J33.A4/B9 J33.B4/A9 | length 847.7
  L1 w7: C2.2@794,1728.46 795.29,1727.17 803.12,1735 FB1.1@863.5,1735 874.5,1746.01 874.5,1766.3 896.69,1788.49 896.69,1844.5 ; J33.B4/A9@814.44,2055.12 814.44,2019.77 803.08,2008.41 803.08,1972.13 840.21,1935 840.21,1878.73 874.44,1844.5 896.69,1844.5 ; J33.A4/B9@1003.42,2055.12 1003.42,2042.99 1003.42,2040.78 1057.55,1986.65 1065.82,1986.65 1077.68,1974.79 1077.68,1938.51 1061.17,1922 1022.78,1922 1005.5,1904.72 1005.5,1884.44 992.06,1871 990.56,1869.5 990.48,1869.5 988.4,1867.41 919.6,1867.41 896.69,1844.5
VCCIO: C4.2 C6.2 JP1.1 U1.3 U1.9 | length 987.4
  L1 w7: C4.2@722,1730.46 722,1728.68 759.22,1691.46 v1@759.22,1689.72 ; v1(819.41,1449.44) 822.92,1449.44 834.38,1460.9 848.49,1460.9 850.34,1462.74 C6.2@850.34,1475 ; v1(845,1515) 845,1511.48 851.3,1505.19 851.3,1490.24 C6.2@866.54,1475 867.73,1475 875.25,1482.52 883.81,1491.08 883.81,1508.81 894.2,1519.2 894.2,1548.11 U1.9@895.07,1548.98 ; v1@902,1722.47 902,1695.89 910.49,1687.4 910.49,1684.42 911.37,1683.55 911.37,1672.45 U1.3@912.79,1671.03 ; v1(970,1515) 970,1530 984.5,1544.5 1048.1,1544.5 1073.75,1570.15 JP1.1@1073.75,1575
  L4 w7: v1(759,1691.86) 759,1660 816,1603 v1(816,1601) ; v1(819.41,1449.44) 817.7,1451.14 817.7,1599.3 v1(816,1601) ; v1(845,1515) v1(970,1515) ; v1(899.51,1724.96) 899.51,1684.51 v1(816,1601)
Vin_3V3: C16.2 JP9.2 TP15.1 U4.1 U4.7 | length 626
  L1 w7: U4.1@-210.43,624.53 -168.35,624.53 U4.7@-156.54,624.53
  L1 w15: JP9.2@-381.07,613.75 -379.82,615 v1(-345,615) ; v1(-165,642.64) -165.96,641.69 -165.96,629.68 -168.35,627.29 -168.35,619.78 -167.19,618.62 U4.7@-157.28,618.62 ; C16.2@-50,603.46 v1(-50,640)
  L4 w15: v1(-345,615) v1@-338.36,608.36 ; TP15.1@-321.07,490 -368.12,537.06 -368.12,578.6 v1@-338.36,608.36 ; v1(-50,640) -161,640 -163.65,642.64 v1(-165,642.64) -304.08,642.64 v1@-338.36,608.36
Vin_5V: C26.2 JP13.2 L3.2 TP13.1 U6.4 U6.5 | length 1033.7
  L1 w15: v1(-508.68,565.65) v1@-507.32,565.65 ; -486.68,545 JP13.2@-466.07,545 ; L3.2@-290,405 -277.5,417.5 L3.2@-275,420
  L1 w20: v1@-507.32,565.65 -486.68,545 ; L3.2@-282.5,417.5 -277.5,417.5 -188.5,417.5 v1@-179.41,417.5 ; L3.2@-270,375 v1(-221.91,375)
  L4 w20: v1(-508.68,565.65) -539.27,565.65 -569.92,535 TP13.1@-571.07,535 -459.97,423.91 -411.06,375 v1(-221.91,375) ; v1(-175.96,420.95) -68.13,420.95 v1@-53.38,406.2 ; v1(-54.33,408.51) -53.38,407.55 -45.55,407.55 v1(83,279)
Vin_6V: C17.1 C18.1 JP14.2 L2.1 TP14.1 U5.2 U5.9 | length 1008.6
  L1 w7: U5.2@148.97,553.9 149.76,553.9 150.99,555.13 150.99,567.99 v1(153,570)
  L1 w9: U5.9@148.97,416.11 147.72,416.11 147.5,415.88 147.5,395.27 151.75,395.27 157.02,390 v1(160,390)
  L1 w15: JP14.2@53.93,676.25 61.79,668.39 83.26,668.39 90.65,661 v1(92,661) ; v1@94.68,368.07 v1(95,367.75) ; v1@159.04,390.96 v1(160,390) ; C18.1@328.46,255 C18.1@332.5,259.04
  L4 w15: v1(92,661) 90.65,661 89.69,660.04 74.73,660.04 54.18,639.49 54.18,555 ; v1(153,570) 151.65,570 136.65,555 54.18,555 ; TP14.1@372.58,165.37 370,167.95 v1(370,260) 240,390 v1(160,390) 135.37,365.37 v1(54.18,365.37) 54.09,365.46 54.09,434.91 v1(54,435) 54.18,435.18 54.18,555
Vsystem: C9.2 D2.A D3.A JP9.1 JP13.1 JP14.1 TP12.1 U2.10 U2.11 | length 1431.3
  L1 w7: C9.2@-483.63,1099.85 U2.10@-369.06,1099.85 U2.11@-369.06,1080.16
  L1 w15: v1@-609,980 -609,980.24 v1(-608.04,981.2) -606.69,981.2 -602.35,976.86 -565.95,976.86 v1(-565.5,976.41) -565.5,977.76 -569.63,981.89 -569.63,1004.04 -582.01,1016.42 D2.A@-591.07,1016.42 ; v1(-602,725) v1(-570,725) -570.53,724.47 -570.53,650.54 TP12.1@-571.07,650 -503.57,650 ; v1(-531,742) -530.04,741.04 -530.04,721.4 -515,706.35 v1(-515,705) -515,661.44 -503.57,650 ; C9.2@-480,1080 -474.73,1080 -452.68,1057.96 -435.96,1057.96 v1(-435,1057) v1(-407.05,1057) ; JP13.1@-466.07,612.5 -503.57,650 ; v1(-459,509) -458.04,509.96 -449.3,509.96 -431.57,527.68 -431.57,561.75 ; -452.07,597 -440.06,597 -432.63,589.57 ; -431.57,588.51 -431.57,561.75 ; v1(-428,492) -427.04,492.96 -427.04,502.63 -383.42,546.25 JP9.1@-381.07,546.25 ; v1(-338.62,561.89) -339.58,560.93 -366.39,560.93 JP9.1@-381.07,546.25 ; v1(-161.07,993.5) D3.A@-161.07,1056.42 ; v1@-17.56,507.56 v1(-14.69,507.56) -14.69,685.64 27.93,728.25 50,728.25 ; -431.57,561.75 -389.86,561.75 -381.07,552.97 JP9.1@-381.07,546.25
  L4 w15: v1(-161.07,993.5) -161.07,874.65 -138.88,852.47 v1(-138.88,851.12)
WINC_CHIP_EN_5: TP5.1 U3.4 | length 112.3
  L1 w15: U3.4@-684.7,2187.1 -681.8,2190 v1(-630,2190)
  L4 w15: v1(-630,2190) -616.06,2190 TP5.1@-586.07,2160
WINC_RESET_5: TP4.1 U3.50 | length 166.4
  L1 w15: v1@-234.52,2230.48 -189.69,2275.31 -163.42,2275.31 U3.50@-157.14,2281.59
  L4 w15: TP4.1@-266.07,2175 -259.44,2181.63 -259.44,2205.56 v1(-235,2230)
WINC_UART_RXI_5: TP3.1 U3.3 | length 262.3
  L1 w15: U3.3@-684.7,2234.34 -678.42,2240.62 -647.08,2240.62 -645.53,2242.18 v1(-644.17,2242.18)
  L4 w15: v1(-644.17,2242.18) -644.17,2243.53 -645.92,2245.28 -645.92,2279.79 -616.21,2309.5 -531.73,2309.5 -512.23,2290 TP3.1@-486.07,2290
WINC_UART_TXO_5: TP2.1 U3.2 | length 363.2
  L1 w15: U3.2@-684.7,2281.59 -638.58,2281.59 -617.38,2260.39 -617.38,2254.53 v1(-616.42,2253.58)
  L4 w15: v1(-616.42,2253.58) -590,2280 -531.93,2280 -502.43,2250.5 -441.06,2250.5 -401.56,2290 TP2.1@-376.07,2290
XIN_32_5: C14.2 U3.29 Y1.1 | length 458.8
  L1 w7: Y1.1@-519.21,1270 -519.21,1255.29 -491.24,1227.32 -457.04,1227.32 -452.94,1231.42 -452.94,1308.58 -434.19,1327.33 -320.28,1327.33 -310.47,1317.52 -310.47,1300.47 -306.37,1296.37 C14.2@-275.7,1296.37
  L1 w15: U3.29@-279.34,1374.45 -277.52,1372.63 -277.52,1298.19 C14.2@-275.7,1296.37
XOUT_32_5: C15.2 U3.30 Y1.2 | length 313.4
  L1 w7: Y1.2@-420.79,1270 -415.61,1264.82 -246.34,1264.82 -231.16,1280 -224.53,1280 C15.2@-211.07,1293.47 -211.07,1294.7 -232.09,1315.72 U3.30@-232.09,1374.45
pads on no net: DN1.8 DN1.9 DN1.12 FL1.5 J1.1 J1.8 J1.MH1 J1.MH2 J2.6 J2.8 J32.S1 J32.S2 J33.A8 J33.B8 J33.MH U1.8 U1.11 U3.5 U3.6 U3.45 U3.46 U3.47 U3.48 U3.49 U4.3 U5.13 U7.1 U7.7 U7.10 U7.11 U7.12 U7.14

## Polygon pours and split planes (outlines as drawn)
3V3 on L2 "3V3_L02_P006" (solid, pour order 6): 930,2050 945,2035 945,1380 1135,1380 1140,1385 1090,1435 1090,2040
6V on L2 "6V_L02_P000" (solid, pour order 0): -807.5,590 157.5,590 367.5,380 975,380 975,1384.49 926.02,1385.74 525.66,675 -807.5,675
3V3 on L2 "3V3_L02_P007" (solid, pour order 7): 390,2220 400,2230 400,2345 -1100,2345 -1100,1954.69 390,1985 395,1990
Vsystem on L2 "VSYSTEM_L02_P014" (solid, pour order 14): -630,1140 -850,920 -850,525 -785,460 5,460 40,495 -80,615 -80,940 -295,940 -490,1135 -630,1135
5V on L2 "5V_L02_P001" (solid, pour order 1): 35,1350 485,1350 485,725 -15,725 -15,1350
5V on L2 "5V_L02_P015" (solid, pour order 15): 470,1285 605,1285 605,1070 600,1065 600,990 445,990 430,1005 455,1030 455,1280
5V on L2 "5V_L02_P016" (solid, pour order 16): 910,1720 910,1610 915,1605 875,1565 145,1565 145,1700 155,1710
3V3 on L2 "3V3_L02_P005" (solid, pour order 5): 625,45 645,25 1165,25 1165,1505 1080,1590 1015,1525 655,1525 640,1510
3V3 on L2 "3V3_L02_P018" (solid, pour order 18): -580,2105 -580,830 -1090,830 -1100,840 -1100,2100 -1090,2110
3V3 on L2 "3V3_L02_P004" (solid, pour order 4): 330,2345 330,1985 1135,1985 1140,1990 1140,2345
VBAT on L2 "VBAT_L02_P013" (solid, pour order 13): -148.98,1089.64 -781.18,2102.36 -854.27,2062.66 -199.91,1071.27
VBAT on L2 "VBAT_L02_P008" (solid, pour order 8): -280,1140 -280,1000 -270,990 -40,990 -40,1135 -45,1140
5V on L2 "5V_L02_P003" (solid, pour order 3): 130,2190 180,2190 180,1285 130,1285
VBAT on L2 "VBAT_L02_P011" (solid, pour order 11): -1060,2160 -730,2160 -738.07,2151.93 -738.07,2000 -1055,2000
OUT_3V3 on L1 "NONET_L01_P-001" (solid, pour order 25): -242,805 -242,700 -292,650 -306,650 -306,610 -274,578 -202,578 -211,569 -211,557 -211,436 -235,436 -328,529 -328,615 -423.5,710.5 -413,721 -413,805
GND on L1 "NONET_L01_P-001" (solid, pour order 21): 118,678 118,608.3 116.6,606.9 138.5,585 193,585 193,555 194,556 253,556 253,678
Vin_6V on L1 "NONET_L01_P-001" (solid, pour order 27): 43,448 43,357 46,354 106,354 106,414 72,448 58,448
GND on L1 "NONET_L01_P-001" (solid, pour order 26): -194,584 -194,551 -181,538 -99,538 -105,544 -105,584
Vin_5V on L1 "NONET_L01_P-001" (solid, pour order 23): -71,420 -65,414 -65,374 -29,374 40,305 40,212 63,189 105,189 105,284 -29,418 -34,418
GND on L1 "NONET_L01_P-001" (solid, pour order 22): 192,415 196,411 196,291 231,256 228,253 228,193 199,193 193,187 195,185 195,110 227,78 233,84 327,84 327,184 290,221 292,223 292,427 192,427
Vin_6V on L1 "NONET_L01_P-001" (solid, pour order 20): 295,365 298,362 298,229 402,229 404,231 399,236 399,365
OUT_6V on L1 "NONET_L01_P-001" (solid, pour order 19): 266,504 264,502 264,445 298,445 302,441 302,375 436,375 437,374 437,502
GND on L3 "GND_L03_P009" (solid, pour order 9): -1175,2355 1220,2355 1270,2305 1270,-30 45,-30 -20,-95 -1265,-95 -1265,2365 -1315,2415 1205,2415 1205,2345 1280,2270 1280,2460

## Silkscreen, mask and mechanical layers (free items; w line width, h text height)
Top Overlay:
  drawing of 11 lines, arcs and shapes, not listed
  text "FB_M2" at 893,657 h30
  text "FB_M1" at -1032,641 h30
  text "CT_M1" at -1033,540 h30
  text "VCC" at -1030,414 h30
  text "VCC" at 962,407 h30
  text "GND" at 959,325 h30
Board Layer Stack Bottom Overlay:
  drawing of 10 lines, arcs and shapes, not listed
  text "MIC-" at 298,2182 h30
  text "MIC+" at 167,2181 h30
  text "PCBA S/N" at 134,1730 h30
  text "Version: 1.0" at 166,1479 h30
  text "AI_A27" at 572,1013 h30
  text "AI_A25" at 756,1013 h30
  text "AI_B8" at 365,948 h30
  text "SPK+" at 568,719 h30
  text "SPK-" at 447,718 h30
  text "AI_A26" at 632,644 h30 r270
  text "-" at 728,267 h30
  text "-" at -518,264 h30
  text "+" at -761,262 h30
  text "+" at 487,262 h30
  text "PA17" at -760,184 h30
  text "MOSI" at 1118,130 h30
  text "A0" at 589,129 h30
  text "3V3" at 699,129 h30
  text "RST" at 800,129 h30
  text "SS" at 888,129 h30
  text "SCK" at 997,129 h30
  text "PA06" at -103,128 h30
  text "GND" at 514,128 h30
  text "PB02" at -232,127 h30
  text "PA22" at -855,125 h30
  text "PB03" at -360,125 h30
  text "GND" at -1089,124 h30
  text "PB22" at -488,124 h30
  text "VCC" at -984,123 h30
Board Outline:
  lines w10: -1201,2362.37 -1201,0 1181,0 1181,2362 -1200.63,2362

## Text inside footprints (layer, text, board x,y; h text height)
J1: Designer Notes "Card Inserted" at -1414.52,849.15 h29.53 r270; Designer Notes "Card Ejected" at -1541.49,849.15 h29.53 r270; Designer Notes "Card Fully Removed" at -1914.59,849.15 h29.53 r270
J33: Designer Notes "Cable Molding" at 1562.98,2435.09 h35 r180
R1: Librarian Notes "SS 102512, ADDED SILKSCREEN." at 841.15,1832.63 h1
R2: Librarian Notes "SS 102512, ADDED SILKSCREEN." at -523.07,891 h1
R3: Librarian Notes "SS 102512, ADDED SILKSCREEN." at -368.51,1250.8 h1
R4: Librarian Notes "SS 102512, ADDED SILKSCREEN." at -509.07,1144 h1 r180
R5: Librarian Notes "SS 102512, ADDED SILKSCREEN." at -199.07,929 h1 r180
R6: Librarian Notes "SS 102512, ADDED SILKSCREEN." at -64.07,929 h1 r180
R7: Librarian Notes "SS 102512, ADDED SILKSCREEN." at 957,1379 h1 r180
R8: Librarian Notes "SS 102512, ADDED SILKSCREEN." at 1033,916 h1
R9: Librarian Notes "SS 102512, ADDED SILKSCREEN." at 551.93,726 h1
R10: Librarian Notes "SS 102512, ADDED SILKSCREEN." at 1159.74,1163.63 h1 r180
R11: Librarian Notes "SS 102512, ADDED SILKSCREEN." at 17.93,803 h1 r90
R12: Librarian Notes "SS 102512, ADDED SILKSCREEN." at -792.07,2028 h1 r90
R13: Librarian Notes "SS 102512, ADDED SILKSCREEN." at 744.61,2016.27 h1
R14: Librarian Notes "SS 102512, ADDED SILKSCREEN." at -792.07,2173 h1 r90
R15: Librarian Notes "SS 102512, ADDED SILKSCREEN." at 1136.14,1930.65 h1 r180
R16: Librarian Notes "SS 102512, ADDED SILKSCREEN." at 1097,1779 h1 r180
R17: Librarian Notes "SS 102512, ADDED SILKSCREEN." at 1021.93,1916 h1
R19: Librarian Notes "SS 102512, ADDED SILKSCREEN." at 954.6,1314.96 h1 r180
R20: Librarian Notes "SS 102512, ADDED SILKSCREEN." at 875,1277.54 h1 r270
R21: Librarian Notes "SS 102512, ADDED SILKSCREEN." at 572.93,1958 h1 r90
R22: Librarian Notes "HISTORY: MT 021711, OLDER FOOTPRINT. STANDARD MAX HEIGHT 1.1MM" at 266.28,2110.24 h1 r90; Librarian Notes "LOCATION: SURFACEMOUNT2LEAD.PCBLIB" at 264.28,2110.24 h1 r90; Librarian Notes "2. SS 102512, ADDED SILKSCREEN." at 268.28,2110.24 h1 r90
R23: Librarian Notes "SS 102512, ADDED SILKSCREEN." at 497.93,1958 h1 r90
R24: Librarian Notes "SS 102512, ADDED SILKSCREEN." at 663,1216 h1
R30: Librarian Notes "HISTORY: MT 021711, OLDER FOOTPRINT. STANDARD MAX HEIGHT 1.1MM" at 257.91,119.14 h1 r180; Librarian Notes "LOCATION: SURFACEMOUNT2LEAD.PCBLIB" at 257.91,117.14 h1 r180; Librarian Notes "2. SS 102512, ADDED SILKSCREEN." at 257.91,121.14 h1 r180
R31: Librarian Notes "HISTORY: MT 021711, OLDER FOOTPRINT. STANDARD MAX HEIGHT 1.1MM" at 40.93,39 h1 r180; Librarian Notes "LOCATION: SURFACEMOUNT2LEAD.PCBLIB" at 40.93,37 h1 r180; Librarian Notes "2. SS 102512, ADDED SILKSCREEN." at 40.93,41 h1 r180
R33: Librarian Notes "SS 102512, ADDED SILKSCREEN." at 116.93,2206 h1
R34: Librarian Notes "SS 102512, ADDED SILKSCREEN." at 282.38,2086.32 h1
R35: Librarian Notes "SS 102512, ADDED SILKSCREEN." at 193,1141 h1
R36: Librarian Notes "2. SS 102512, ADDED SILKSCREEN." at 116.93,2024 h1; Librarian Notes "LOCATION: SURFACEMOUNT2LEAD.PCBLIB" at 116.93,2028 h1; Librarian Notes "HISTORY: MT 021711, OLDER FOOTPRINT. STANDARD MAX HEIGHT 1.1MM" at 116.93,2026 h1
R37: Librarian Notes "HISTORY: MT 021711, OLDER FOOTPRINT. STANDARD MAX HEIGHT 1.1MM" at 2.93,1958 h1 r90; Librarian Notes "LOCATION: SURFACEMOUNT2LEAD.PCBLIB" at 0.93,1958 h1 r90; Librarian Notes "2. SS 102512, ADDED SILKSCREEN." at 4.93,1958 h1 r90
R38: Librarian Notes "HISTORY: MT 021711, OLDER FOOTPRINT. STANDARD MAX HEIGHT 1.1MM" at -97.07,1958 h1 r90; Librarian Notes "LOCATION: SURFACEMOUNT2LEAD.PCBLIB" at -99.07,1958 h1 r90; Librarian Notes "2. SS 102512, ADDED SILKSCREEN." at -95.07,1958 h1 r90
R39: Librarian Notes "SS 102512, ADDED SILKSCREEN." at 305.93,1024 h1 r180
U3: Designer Notes "Antenna Area / Keep copper out / Must overhang edge" at -747.91,2454.27 h75